# EAGLE board Leds (EAGLE 4.11)
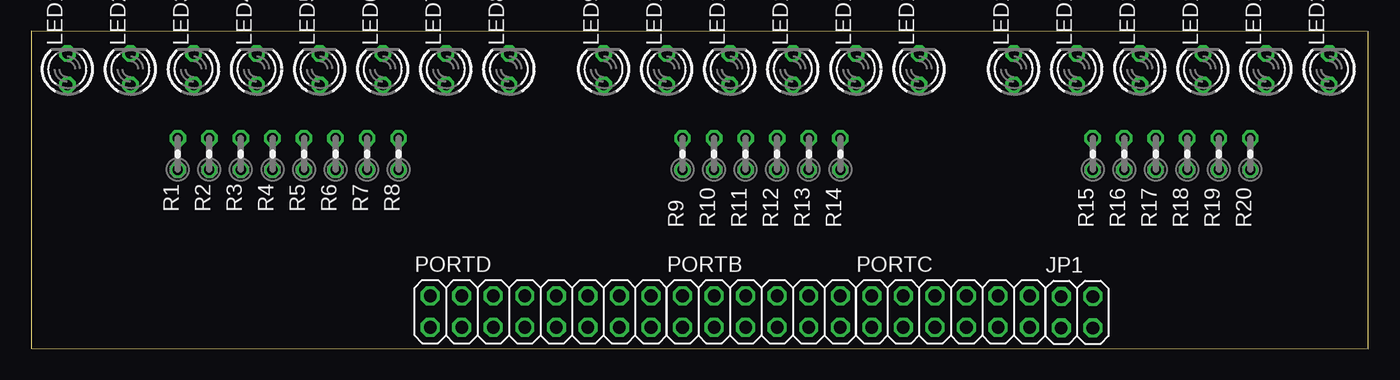
[diagram p0: board, top side]
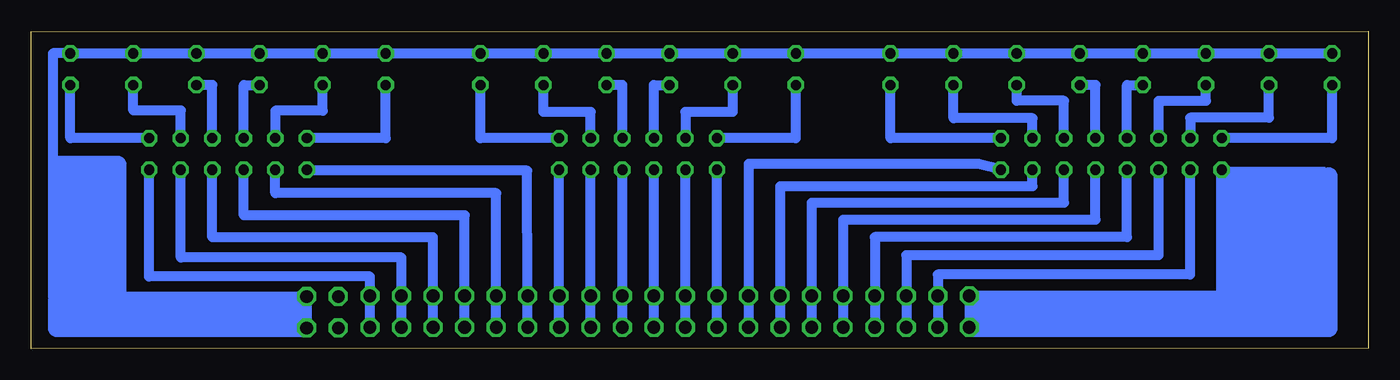
[diagram p1: board, bottom side, seen from below]

Size 107.69 x 25.62 mm. Coordinates in mm from the lower left corner, seen from the top.
Outline: 0,0.07 107.69,0 107.69,25.56 0,25.62 0,0.07
Copper layers (1*16): Top 0.035mm / dielectric 1.5mm / Bottom 0.035mm
Design rules "default": minimum track width 10mil, minimum drill 24mil, track to track 8mil, track to pad 8mil, pad to pad 8mil, via to via 8mil, smd to smd 8mil, copper to edge 40mil, drill to drill 8mil, minimum pad ring 10mil, minimum via ring 8mil, stop-mask expansion 4mil, vias tented up to drill 0mil, thermal gap 10mil

## Footprints (pad centres in the part's own frame; a part is rotated, then mirrored left to right if it is on the bottom)
2X02 = drill 1.016 octagon: 1 -1.27,-1.27; 2 -1.27,1.27; 3 1.27,-1.27; 4 1.27,1.27
LED3MM = drill 0.813 octagon: A -1.27,0; K 1.27,0
2X06 = drill 1.016 octagon: 1 -6.35,-1.27; 2 -6.35,1.27; 3 -3.81,-1.27; 4 -3.81,1.27; 5 -1.27,-1.27; 6 -1.27,1.27; 7 1.27,-1.27; 8 1.27,1.27; 9 3.81,-1.27; 10 3.81,1.27; 11 6.35,-1.27; 12 6.35,1.27
2X08 = drill 1.016 octagon: 1 -8.89,-1.27; 2 -8.89,1.27; 3 -6.35,-1.27; 4 -6.35,1.27; 5 -3.81,-1.27; 6 -3.81,1.27; 7 -1.27,-1.27; 8 -1.27,1.27; 9 1.27,-1.27; 10 1.27,1.27; 11 3.81,-1.27; 12 3.81,1.27; 13 6.35,-1.27; 14 6.35,1.27; 15 8.89,-1.27; 16 8.89,1.27
0204V = drill 0.813 octagon: 1 -1.27,0; 2 1.27,0

## Placement (x,y rotation side)
JP1  [2X02]  84.22,2.96 0 top
LED1  [LED3MM]  2.93,22.55 90 top
LED2  [LED3MM]  8.01,22.55 90 top
LED3  [LED3MM]  13.09,22.55 90 top
LED4  [LED3MM]  18.17,22.55 90 top
LED5  [LED3MM]  23.25,22.55 90 top
LED6  [LED3MM]  28.33,22.55 90 top
LED7  [LED3MM]  33.41,22.55 90 top
LED8  [LED3MM]  38.49,22.55 90 top
LED9  [LED3MM]  46.11,22.55 90 top
LED10  [LED3MM]  51.19,22.55 90 top
LED11  [LED3MM]  56.27,22.55 90 top
LED12  [LED3MM]  61.35,22.55 90 top
LED13  [LED3MM]  66.43,22.55 90 top
LED14  [LED3MM]  71.51,22.55 90 top
LED15  [LED3MM]  79.13,22.55 90 top
LED16  [LED3MM]  84.21,22.55 90 top
LED17  [LED3MM]  89.29,22.55 90 top
LED18  [LED3MM]  94.37,22.55 90 top
LED19  [LED3MM]  99.45,22.55 90 top
LED20  [LED3MM]  104.53,22.55 90 top
PORTB  [2X06]  58.81,3.01 0 top
PORTC  [2X06]  74.05,3.01 0 top
PORTD  [2X08]  41.03,3.01 0 top
R1  [0204V]  11.82,15.71 90 top
R2  [0204V]  14.36,15.71 90 top
R3  [0204V]  16.9,15.71 90 top
R4  [0204V]  19.44,15.71 90 top
R5  [0204V]  21.98,15.71 90 top
R6  [0204V]  24.52,15.71 90 top
R7  [0204V]  27.06,15.71 90 top
R8  [0204V]  29.6,15.71 90 top
R9  [0204V]  52.46,15.71 90 top
R10  [0204V]  55,15.71 90 top
R11  [0204V]  57.54,15.71 90 top
R12  [0204V]  60.08,15.71 90 top
R13  [0204V]  62.62,15.71 90 top
R14  [0204V]  65.16,15.71 90 top
R15  [0204V]  85.48,15.71 90 top
R16  [0204V]  88.02,15.71 90 top
R17  [0204V]  90.56,15.71 90 top
R18  [0204V]  93.1,15.71 90 top
R19  [0204V]  95.64,15.71 90 top
R20  [0204V]  98.18,15.71 90 top

## Library data of the parts
JP1 PORTB PORTC PORTD = pinhead
LED1-LED20 = led
R1-R20 = rcl

## Nets
GND: JP1.3 JP1.4 LED1.K LED2.K LED3.K LED4.K LED5.K LED6.K LED7.K LED8.K LED9.K LED10.K LED11.K LED12.K LED13.K LED14.K LED15.K LED16.K LED17.K LED18.K LED19.K LED20.K
N$1: PORTB.1 PORTB.2 R9.1
N$2: PORTB.3 PORTB.4 R10.1
N$3: PORTB.5 PORTB.6 R11.1
N$4: PORTB.7 PORTB.8 R12.1
N$5: PORTB.9 PORTB.10 R13.1
N$6: PORTB.11 PORTB.12 R14.1
N$7: PORTC.1 PORTC.2 R15.1
N$8: PORTC.3 PORTC.4 R16.1
N$9: PORTC.5 PORTC.6 R17.1
N$10: PORTC.7 PORTC.8 R18.1
N$11: PORTC.9 PORTC.10 R19.1
N$12: PORTC.11 PORTC.12 R20.1
N$13: PORTD.1 PORTD.2 R1.1
N$14: PORTD.3 PORTD.4 R2.1
N$15: PORTD.5 PORTD.6 R3.1
N$16: PORTD.7 PORTD.8 R4.1
N$17: PORTD.9 PORTD.10 R5.1
N$18: PORTD.11 PORTD.12 R6.1
N$19: PORTD.13 PORTD.14 R7.1
N$20: PORTD.15 PORTD.16 R8.1
N$21: LED1.A R1.2
N$22: LED2.A R2.2
N$23: LED3.A R3.2
N$24: LED4.A R4.2
N$25: LED5.A R5.2
N$26: LED6.A R6.2
N$27: LED7.A R7.2
N$28: LED8.A R8.2
N$29: LED9.A R9.2
N$30: LED10.A R10.2
N$31: LED11.A R11.2
N$32: LED12.A R12.2
N$33: LED13.A R13.2
N$34: LED14.A R14.2
N$35: LED15.A R15.2
N$36: LED16.A R16.2
N$37: LED17.A R17.2
N$38: LED18.A R18.2
N$39: LED19.A R19.2
N$40: LED20.A R20.2

## Tracks (layer width: path | path; a pad name or v marks a point on that pad's centre or on a via)
GND
  Bottom 0.406: JP1.3 | JP1.4 | 104.54,23.82 LED20.K
  Bottom 0.813: LED1.K LED2.K LED3.K LED4.K LED5.K LED6.K LED7.K LED8.K LED9.K LED10.K LED11.K LED12.K LED13.K LED14.K LED15.K LED16.K LED17.K LED18.K LED19.K LED20.K | JP1.4 JP1.3 | JP1.4 105.93,4.23 105.93,23.82 104.54,23.82
N$1
  Bottom 0.813: R9.1 PORTB.2 PORTB.1
N$2
  Bottom 0.813: R10.1 PORTB.4 PORTB.3
N$3
  Bottom 0.813: R11.1 PORTB.6 PORTB.5
N$4
  Bottom 0.813: R12.1 PORTB.8 PORTB.7
N$5
  Bottom 0.813: R13.1 PORTB.10 PORTB.9
N$6
  Bottom 0.813: R14.1 PORTB.12 PORTB.11
N$7
  Bottom 0.813: R15.1 85.51,14.37 67.73,14.37 PORTC.2 PORTC.1
N$8
  Bottom 0.813: R16.1 88.02,12.56 70.24,12.56 PORTC.4 PORTC.3
N$9
  Bottom 0.813: R17.1 90.56,10.77 72.78,10.77 PORTC.6 PORTC.5
N$10
  Bottom 0.813: R18.1 93.1,8.99 75.32,8.99 PORTC.8 PORTC.7
N$11
  Bottom 0.813: R19.1 95.64,7.36 77.86,7.36 PORTC.10 PORTC.9
N$12
  Bottom 0.813: R20.1 98.18,5.83 80.4,5.84 PORTC.12 PORTC.11
N$13
  Bottom 0.813: R1.1 11.82,4.28 PORTD.2 PORTD.1
N$14
  Bottom 0.813: R2.1 14.36,5.99 34.68,5.99 PORTD.4 PORTD.3
N$15
  Bottom 0.813: R3.1 16.9,7.54 37.22,7.54 PORTD.6 PORTD.5
N$16
  Bottom 0.813: R4.1 19.44,9.01 39.76,9.01 PORTD.8 PORTD.7
N$17
  Bottom 0.813: R5.1 21.98,10.4 42.3,10.4 PORTD.10 PORTD.9
N$18
  Bottom 0.813: R6.1 24.52,11.78 44.84,11.78 PORTD.12 PORTD.11
N$19
  Bottom 0.813: R7.1 27.06,13.09 47.38,13.09 PORTD.14 PORTD.13
N$20
  Bottom 0.813: R8.1 31.39,14.92 49.92,14.92 PORTD.16 PORTD.15
N$21
  Bottom 0.813: R1.2 2.93,16.98 LED1.A
N$22
  Bottom 0.813: LED2.A 8.01,18.64 14.36,18.64 R2.2
N$23
  Bottom 0.813: LED3.A 13.09,20.01 16.9,20.01 R3.2
N$24
  Bottom 0.813: LED4.A 19.44,21.28 R4.2
N$25
  Bottom 0.813: LED5.A 21.98,21.28 R5.2
N$26
  Bottom 0.813: LED6.A 28.33,20.01 24.52,20.01 R6.2
N$27
  Bottom 0.813: R7.2 27.06,18.6 33.41,18.6 LED7.A
N$28
  Bottom 0.813: R8.2 38.49,16.98 LED8.A
N$29
  Bottom 0.813: R9.2 46.11,16.98 LED9.A
N$30
  Bottom 0.813: LED10.A 51.19,19.1 55,19.1 R10.2
N$31
  Bottom 0.813: LED11.A 57.54,21.28 R11.2
N$32
  Bottom 0.813: LED12.A 60.08,21.28 R12.2
N$33
  Bottom 0.813: LED13.A 66.43,19.1 62.62,19.1 R13.2
N$34
  Bottom 0.813: R14.2 71.51,16.98 LED14.A
N$35
  Bottom 0.813: LED15.A 79.13,16.98 R15.2
N$36
  Bottom 0.813: LED16.A 84.21,19.2 88.02,19.2 R16.2
N$37
  Bottom 0.813: LED17.A 90.56,21.28 R17.2
N$38
  Bottom 0.813: LED18.A 93.1,21.28 R18.2
N$39
  Bottom 0.813: LED19.A 99.45,19.23 95.64,19.23 R19.2
N$40
  Bottom 0.813: LED20.A 104.53,16.98 R20.2
N$41
  Bottom 1.422: 32.15,1.66 3.21,1.66 3.21,13.95
N$42
  Bottom 1.422: 85.52,1.67 105.62,1.67 105.62,3.89
N$43
  Bottom 1.422: 100.7,4.43 100.7,14.88 105.49,14.88
(copper drawn outside any net)
  shapes: Bottom area x4